# Altium PCB main_PCB.PcbDoc (part 2 of 2)
Units mm, origin at the board's own origin, x right, y up, seen from the top; angles counter-clockwise.
Board outline 160 x 70 mm, 2 copper layers (Top Layer, Bottom Layer); 72 components, 57 nets, 335 pads, 76 vias.
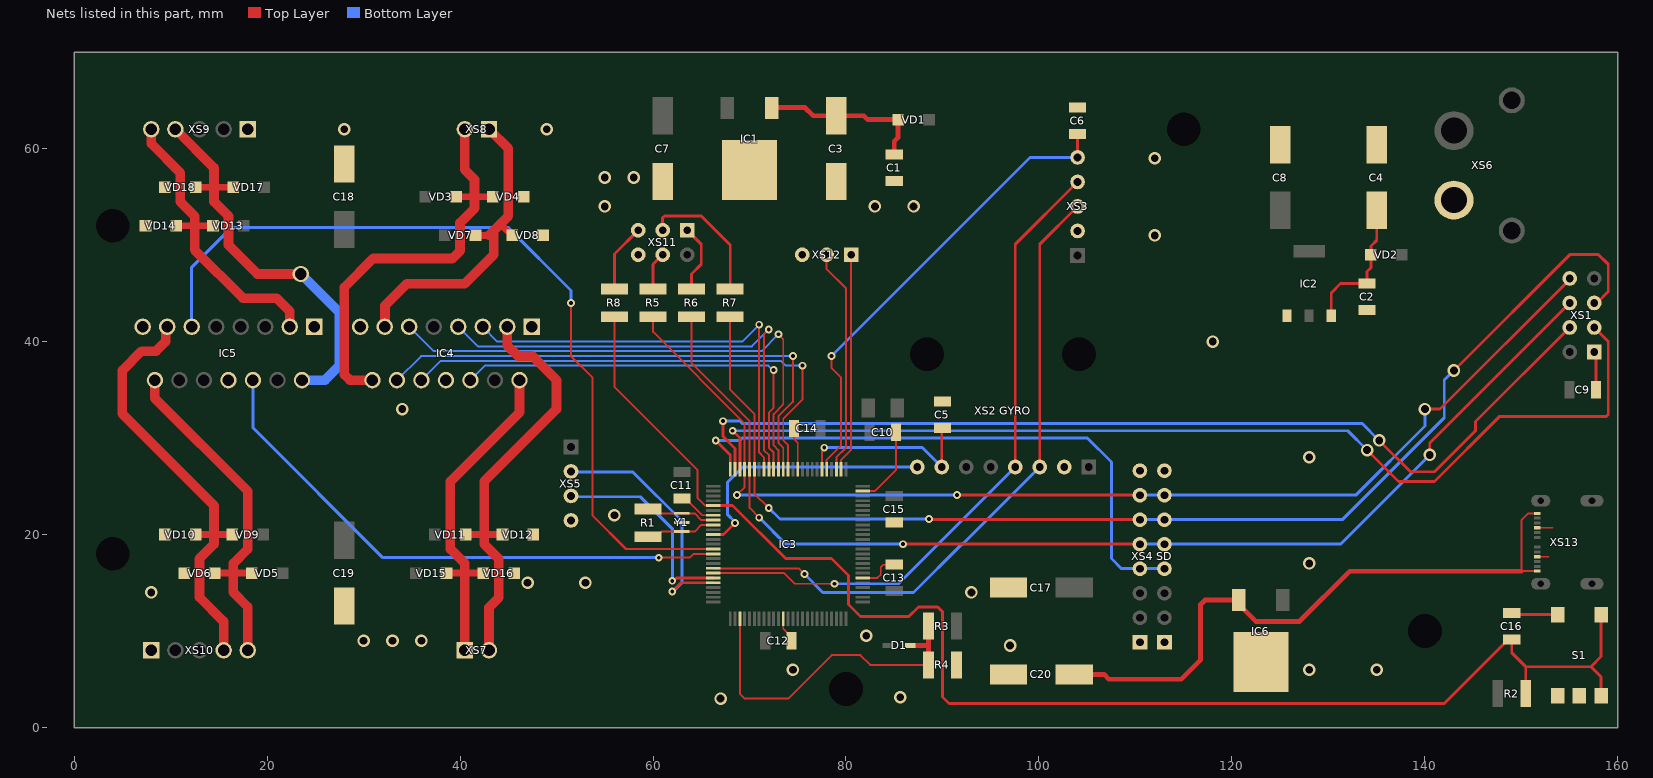
[diagram p2: the nets of this part, all layers, seen from the top]

## Via types
v1: diameter 1.3, hole 0.8, Top Layer to Bottom Layer, tented both sides, 45 vias
v2: diameter 0.8, hole 0.4, Top Layer to Bottom Layer, tented both sides, 30 vias
v3: diameter 1.7, hole 1.2, Top Layer to Bottom Layer, tented both sides, 1 vias

## Nets (pads, with @x,y where several pads share a name; then routed paths per layer and width w, separated by ;. In a path a pad name is that pad's centre, name@x,y a point inside that pad or via, vN(x,y) a via of type N, cw(c..) or ccw(c..) an arc to the next point about the centre after c; other vN are vias at no path point) (continued)
GND: "XS2 GYRO.2" "XS4 SD.1" "XS4 SD.8" C1.2 C2.2 C3.2 C4.2 C5.2 C6.2 C7.2 C8.2 C9.2 C10.2 C11.2 C12.2 C13.2 C14.2 C15.2 C17.2 C18.2 C19.2 C20.2 IC1.2 IC2.1 IC3.11 IC3.32 IC3.62 IC3.81 IC3.99 IC4.1 IC4.8 IC4.15 IC5.1 IC5.8 IC5.15 IC6.2 R4.1 S1.4 S1.5 VD4.2 VD6.2 VD8.2 VD10.2 VD12.2 VD14.2 VD16.2 VD18.2 XS1.1 XS3.2 XS5.4 XS6.2 XS9.1 XS10.1 XS11.6 XS12.3 XS13.4 Y1.2 | length 30.2
  Top Layer w0.2: C11.2@63,23.73 63.37,23.73 65.1,22 IC3.32@66.25,22 ; IC3.62@73.5,11.25 73.5,10.24 C12.2@74.37,9.37 ; C14.2@74.63,31 74.63,29.87 75,29.5 IC3.11@75,26.75 ; IC3.81@81.75,15.5 83.26,15.5 83.602,15.843 83.602,16.602 83.87,16.87 C13.2@85,16.87 ; IC3.99@81.75,24.5 83,24.5 85.17,26.67 C10.2@85.17,30.6 ; XS13.4@151.65,17.7 152.8,17.7 ; XS13.4@151.65,20.7 153.2,20.7
  Top Layer w0.3: C12.2@74.37,9 C12.2@74.37,9.37 ; XS1.1@157.54,38.92 157.74,38.72 C9.2@157.74,35
  other v1: 67,3 85.627,3.127 74.5,6 128,6 135,6 97,8.5 30,9 33,9 36,9 82.1,9.5 8,14 93,14 47,15 53,15 128,17 56,22 128,28 34,33 118,40 112,51 55,54 83,54 87,54 55,57 58,57 112,59 28,62 49,62
"GPS RX": IC3.45 XS5.3 | length 22.1
  Top Layer w0.3: v2(62,15.2) 62.135,15.2 62.435,15.5 IC3.45@66.25,15.5
  Bottom Layer w0.3: XS5.3@51,23.92 58.68,23.92 62,20.6 v2(62,15.2)
"GPS TX": IC3.46 XS5.2 | length 26.4
  Top Layer w0.3: v2(62,14.1) 62.9,15 IC3.46@66.25,15
  Bottom Layer w0.3: XS5.2@51,26.46 57.94,26.46 63,21.4 63,14.965 v2@62.135,14.1
"GYRO ADR": "XS2 GYRO.8" IC3.36 | length 27.6
  Top Layer w0.3: IC3.36@66.25,20 67.3,20 v2(68.5,21.2)
  Bottom Layer w0.3: v2(68.5,21.2) 68.5,21.3 67.7,22.1 67.7,25.4 69.3,27 87.38,27
"GYRO INT": "XS2 GYRO.7" C5.1 IC3.6 | length 19.4
  Top Layer w0.2: IC3.6@77.5,26.75 77.5,28.588 77.75,28.838 v2(77.75,29)
  Top Layer w0.3: 89.92,27 89.92,30.95 C5.1@90,31.03
  Bottom Layer w0.3: v2(77.75,29) 87.92,29 89.92,27
"MAG INT": C6.1 IC3.5 XS3.5 | length 49.3
  Top Layer w0.2: IC3.5@78,26.75 78,27.75 79.5,29.25 79.5,36.25 78.5,37.25 v2(78.5,38.5)
  Top Layer w0.3: XS3.5@104,59.08 C6.1@104,61.53
  Bottom Layer w0.3: v2(78.5,38.5) 99.08,59.08 XS3.5@104,59.08
MISO: "XS4 SD.7" IC3.22 R5.1 XS1.7 | length 119.4
  Top Layer w0.2: R5.1@60,42.55 60,41 69.5,31.5 IC3.22@69.5,26.75 69.5,24.9 v2(68.7,24.1)
  Top Layer w0.3: v2(91.5,24.1) 110.44,24.1 ; v1(140,33) 141.562,33 155,46.438 XS1.7@155,46.54
  Bottom Layer w0.3: v2(68.7,24.1) v2(91.5,24.1) ; 110.46,24.08 113,24.08 132.83,24.08 140,31.25 v1(140,33)
"MLB EN": IC3.18 IC4.5 | length 45.2
  Top Layer w0.2: v2(71,41.75) 71,28.5 71.5,28 IC3.18@71.5,26.75
  Bottom Layer w0.2: IC4.5@42.35,41.53 43.88,40 69.25,40 v2(71,41.75)
"MLF EN": IC3.17 IC4.7 | length 48.7
  Top Layer w0.2: IC3.17@72,26.75 72,28.25 71.5,28.75 71.5,40.75 v2(72,41.25)
  Bottom Layer w0.2: IC4.7@39.81,41.53 41.84,39.5 70.25,39.5 v2(72,41.25)
MOSI: "XS4 SD.5" IC3.21 R6.1 XS1.6 | length 119.9
  Top Layer w0.2: R6.1@64,42.55 64,37.75 70,31.75 70,22.75 v2(71,21.75)
  Top Layer w0.3: v2(85.9,19) 110.46,19 ; v1(140.5,28.25) 140.5,29.5 XS1.6@155,44
  Bottom Layer w0.3: v2(71,21.75) 73.75,19 v2(85.9,19) ; 110.46,19 113,19 131.25,19 v1(140.5,28.25)
"MRB EN": IC3.13 IC4.10 | length 52.3
  Top Layer w0.2: IC3.13@74,26.75 74,29.25 73.5,29.75 73.5,32 75.5,34 v2(75.5,37.5)
  Bottom Layer w0.2: IC4.10@36,36 38,38 73.25,38 73.75,37.5 v2(75.5,37.5)
"MRF EN": IC3.14 IC4.12 | length 54.7
  Top Layer w0.2: IC3.14@73.5,26.75 73.5,29 73,29.5 73,32.25 74.5,33.75 v2(74.5,38.5)
  Bottom Layer w0.2: IC4.12@33.46,36 35.96,38.5 v2(74.5,38.5)
NetC1_1: C1.1 C3.1 IC1.1 VD1.1 | length 17.4
  Top Layer w0.5: IC1.1@72.285,64.217 72.318,64.25 75.75,64.25 76.6,63.4 C3.1@79,63.4 81.85,63.4 81.999,63.251 82.25,63 VD1.1@85.4,63 85.4,61.15 85,60.75 C1.1@85,59.37
NetC2_1: C2.1 C4.1 IC2.3 VD2.1 | length 14.5
  Top Layer w0.3: IC2.3@130.29,42.65 130.29,45.04 131.25,46 C2.1@134,46 134,47.25 134.25,47.5 134.4,47.65 VD2.1@134.4,49 134.4,49.9 135,50.5 C4.1@135,53.6
NetC16_2: C16.2 S1.3 | length 4.8
  Top Layer w0.3: C16.2@149,11.87 149.165,11.705 S1.3@153.753,11.705
NetC20_1: C20.1 IC6.3 XS13.1 | length 65.6
  Top Layer w0.2: XS13.1@151.65,16.2 150,16.2 150,21.5 150.7,22.2 XS13.1@151.65,22.2
  Top Layer w0.3: IC6.3@120.715,12.772 IC6.3@120.715,13.217
  Top Layer w0.5: C20.1@103.65,5.5 106.75,5.5 107.25,5 114.75,5 116.75,7 116.75,12.75 117.217,13.217 IC6.3@120.715,13.217 ; IC6.3@120.715,12.772 122.487,11 127,11 132.2,16.2 150,16.2
NetIC4_2: IC4.2 VD15.2 VD16.1 XS7.1 | length 35.4
  Top Layer w0.7: VD15.2@38.6,16 40.5,16 VD16.1@42.4,16
  Top Layer w1: XS7.1@40.5,8 40.5,16 40.5,17 39,18.5 39,25.5 46.16,32.66 IC4.2@46.16,36
NetIC4_3: IC4.3 VD11.2 VD12.1 XS7.2 | length 44.5
  Top Layer w0.7: VD11.2@40.6,20 42.5,20 VD12.1@44.4,20
  Top Layer w1: XS7.2@43,8 43,12.433 44,13.433 44,17.5 42.5,19 42.5,20 42.5,25.5 50,33 50,36 47.5,38.5 46,38.5 44.89,39.61 IC4.3@44.89,41.53
NetIC4_13: IC4.13 VD7.2 VD8.1 XS8.1 | length 34
  Top Layer w0.7: VD7.2@41.6,51 43,51 ; 44.25,52.15 VD8.1@45.4,51
  Top Layer w1: IC4.13@32.19,41.53 32.227,41.567 32.227,43.727 34.5,46 40.5,46 43.5,49 43.5,51.5 ; 43,51 43.5,51.5 ; XS8.1@43,62 45,60 45,53 44.25,52.25 ; 44.25,52.15 44.25,52.25 ; 43.5,51.5 44.25,52.25
NetIC4_14: IC4.14 VD3.2 VD4.1 XS8.2 | length 43.2
  Top Layer w0.7: VD3.2@39.6,55 41.5,55 VD4.1@43.4,55
  Top Layer w1: IC4.14@30.92,36 28.586,36 28,36.586 28,45.6 31,48.6 39.2,48.6 40,49.4 40,52.3 41.5,53.8 41.5,55 41.5,56.8 40.5,57.8 XS8.2@40.5,62
NetIC5_2: IC5.2 VD17.2 VD18.1 XS9.4 | length 42.6
  Top Layer w0.7: VD18.1@12.6,56 14.5,56 VD17.2@16.5,56
  Top Layer w1: XS9.4@10.5,62 14.5,58 14.5,56 14.5,54.5 16,53 16,50 19,47 v3(23.5,47)
  Bottom Layer w1: v3(23.5,47) 27.5,43 27.5,37.5 26,36 IC5.2@23.62,36
NetIC5_3: IC5.3 VD13.2 VD14.1 XS9.5 | length 32.3
  Top Layer w0.7: VD14.1@10.6,52 12.5,52 VD13.2@14.4,52
  Top Layer w1: XS9.5@8,62 8,60.5 11,57.5 11,54.5 12.5,53 12.5,52 12.5,49.5 17.5,44.5 21,44.5 22.35,43.15 IC5.3@22.35,41.53
NetIC5_13: IC5.13 VD9.2 VD10.1 XS10.4 | length 45.7
  Top Layer w0.7: VD10.1@12.6,20 14.5,20 VD9.2@16.4,20
  Top Layer w1: IC5.13@9.65,41.53 9.5,41.38 9.5,40 8.5,39 7,39 5,37 5,32.5 14.5,23 14.5,20 14.5,19 13,17.5 13,13.5 15.5,11 XS10.4@15.5,8
NetIC5_14: IC5.14 VD5.2 VD6.1 XS10.5 | length 37
  Top Layer w0.7: VD6.1@14.6,16 16.5,16 VD5.2@18.4,16
  Top Layer w1: IC5.14@8.38,36 8.38,34.12 18,24.5 18,18.5 16.5,17 16.5,16 16.5,14 18,12.5 XS10.5@18,8
NetR5_2: R5.2 XS11.4 | length 4
  Top Layer w0.3: R5.2@60,45.45 60,48 XS11.4@61,49
NetR6_2: R6.2 XS11.1 | length 7.1
  Top Layer w0.3: XS11.1@63.54,51.54 65,50.08 65,48 64,47 R6.2@64,45.45
NetR7_2: R7.2 XS11.3 | length 14.1
  Top Layer w0.3: XS11.3@61,51.54 61,52.824 61.176,53 65,53 68,50 R7.2@68,45.45
NetR8_2: R8.2 XS11.5 | length 7.1
  Top Layer w0.3: R8.2@56,45.45 56,49.08 XS11.5@58.46,51.54
"PWM BL": IC3.40 IC5.6 | length 58.4
  Top Layer w0.2: v2(60.6,17.6) 63.8,17.6 64.2,18 IC3.40@66.25,18
  Bottom Layer w0.3: IC5.6@18.54,36 18.54,31.06 32,17.6 v2(60.6,17.6)
"PWM BR": IC3.39 IC5.11 | length 88.1
  Top Layer w0.2: v2(51.5,44) 51.5,38.5 53.75,36.25 53.75,21.95 57.2,18.5 IC3.39@66.25,18.5
  Bottom Layer w0.3: IC5.11@12.19,41.53 12.19,47.69 16.3,51.8 45,51.8 51.5,45.3 v2(51.5,44)
"PWM ML": IC3.16 IC4.6 | length 42.9
  Top Layer w0.2: IC3.16@72.5,26.75 72.5,28.5 72,29 72,32.619 72.5,33.119 v2(72.5,37.05)
  Bottom Layer w0.2: IC4.6@41.08,36 42.58,37.5 71.96,37.5 72.41,37.05 v2(72.5,37.05)
"PWM MR": IC3.15 IC4.11 | length 54.9
  Top Layer w0.2: IC3.15@73,26.75 73,28.75 72.5,29.25 72.5,32.482 73.5,33.482 73.5,40.25 v2(73,40.75)
  Bottom Layer w0.2: IC4.11@34.73,41.53 37.26,39 71.25,39 v2(73,40.75)
RESET: C16.1 IC3.30 R2.2 R8.1 S1.1 S1.2 | length 148.3
  Top Layer w0.2: R8.1@56,42.55 56,35.304 64.59,26.714 64.59,23.836 65.426,23 IC3.30@66.25,23
  Top Layer w0.3: IC3.30@66.25,23 68.25,23 73.75,17.5 78.5,17.5 80.25,15.75 80.25,12.75 81.5,11.5 86.5,11.5 87.5,12.5 89.5,12.5 90,12 90,3.176 90.676,2.5 142,2.5 148.63,9.13 C16.1@149,9.13 149,7.75 150.45,6.3 ; R2.2@150.45,3.5 150.45,6.3 ; S1.2@158.248,3.295 158.248,5.252 157.2,6.3 ; S1.1@158.248,11.705 158.248,7.348 157.2,6.3 ; 150.45,6.3 157.2,6.3
"RF24 CE": IC3.23 XS1.3 | length 109.7
  Top Layer w0.3: v2(68.25,30.75) 69,30 IC3.23@69,26.75 ; v1(134,28.75) 137.25,25.5 141,25.5 147.75,32.25 158.824,32.25 159,32.426 159,40 XS1.3@157.54,41.46
  Bottom Layer w0.3: v2(68.25,30.75) 132,30.75 v1(134,28.75)
"RF24 CSN": IC3.24 XS1.4 | length 102.2
  Top Layer w0.3: v2(67.25,31.75) 67.25,30.178 68.5,28.928 IC3.24@68.5,26.75 ; v1(135.25,29.75) 138.5,26.5 141,26.5 145.25,30.75 145.25,31.71 XS1.4@155,41.46
  Bottom Layer w0.3: v2(67.25,31.75) 69,31.75 69.25,31.5 133.5,31.5 v1(135.25,29.75)
SCK: "XS4 SD.6" IC3.20 R7.1 XS1.5 | length 127.8
  Top Layer w0.2: R7.1@68,42.55 68,35 70.5,32.5 IC3.20@70.5,26.75 70.5,24.25 v2(72,22.75)
  Top Layer w0.3: v2(88.6,21.6) 88.66,21.54 110.46,21.54 ; v1(143,37) 155,49 158,49 159,48 159,45.176 157.824,44 XS1.5@157.54,44
  Bottom Layer w0.3: v2(72,22.75) 73.15,21.6 v2(88.6,21.6) ; 110.46,21.54 113,21.54 131.436,21.54 142,32.104 142,36 v1(143,37)
SCL: "XS2 GYRO.3" IC3.43 XS3.3 | length 68.9
  Top Layer w0.2: IC3.43@66.25,16.5 75.098,16.5 75.698,15.9 v2(75.7,15.9)
  Top Layer w0.3: 100.08,27 100.08,50.08 XS3.3@104,54
  Bottom Layer w0.3: v2(75.7,15.9) 77.6,14 87,14 92,19 92.08,19 100.08,27
"SD CS": "XS4 SD.4" IC3.25 | length 61.7
  Top Layer w0.3: v2(66.5,29.75) 68,28.25 IC3.25@68,26.75
  Bottom Layer w0.3: v2(66.5,29.75) 69,29.75 69.25,30 105,30 107.5,27.5 107.5,17.5 108.54,16.46 110.46,16.46 113,16.46
SDA: "XS2 GYRO.4" IC3.44 XS3.4 | length 69
  Top Layer w0.2: IC3.44@66.25,16 73.6,16 74.7,14.9 v2(78.8,14.9)
  Top Layer w0.3: 97.54,27 97.54,50.08 XS3.4@104,56.54
  Bottom Layer w0.3: v2(78.8,14.9) 85.44,14.9 97.54,27
"Serail RX": IC3.2 XS12.1 | length 22.7
  Top Layer w0.2: IC3.2@79.5,26.75 79.5,27.75 80.54,28.79 XS12.1@80.54,49
"Serial TX": IC3.3 XS12.2 | length 23.5
  Top Layer w0.2: XS12.2@78,49 78,47.5 80,45.5 80,29 79,28 IC3.3@79,26.75
VBAT: D1.1 IC3.53 R3.1 R4.2 | length 35.7
  Top Layer w0.2: IC3.53@69,11.25 69,3.5 69.5,3 74,3 78.5,7.5 81.5,7.5 82.5,6.5 R4.2@88.55,6.5
  Top Layer w0.5: D1.1@86.65,8.5 88.55,8.5 ; R4.2@88.55,6.5 88.55,8.5 ; R3.1@88.55,10.5 88.55,8.5
XTAL1: IC3.34 R1.2 Y1.3 | length 7.3
  Top Layer w0.2: R1.2@59.5,19.75 60.35,19.75 60.9,20.3 Y1.3@63,20.3 64.3,20.3 65,21 IC3.34@66.25,21
XTAL2: IC3.33 R1.1 Y1.1 | length 7.2
  Top Layer w0.2: R1.1@59.5,22.65 60.35,22.65 60.8,22.2 Y1.1@63,22.2 64.3,22.2 65,21.5 IC3.33@66.25,21.5
pads on no net: "XS2 GYRO.5" "XS2 GYRO.6" "XS2 GYRO.nc" "XS4 SD.2" D1.2 IC2.4 IC3.1 IC3.4 IC3.7 IC3.8 IC3.9 IC3.12 IC3.19 IC3.26 IC3.27 IC3.28 IC3.29 IC3.35 IC3.51 IC3.52 IC3.54 IC3.55 IC3.56 IC3.57 IC3.58 IC3.59 IC3.60 IC3.63 IC3.64 IC3.65 IC3.66 IC3.67 IC3.68 IC3.69 IC3.70 IC3.71 IC3.72 IC3.73 IC3.74 IC3.75 IC3.76 IC3.77 IC3.78 IC3.79 IC3.82 IC3.83 IC3.84 IC3.85 IC3.86 IC3.87 IC3.88 IC3.89 IC3.90 IC3.91 IC3.92 IC3.93 IC3.94 IC3.95 IC3.96 IC3.97 XS1.8 XS6.nc XS13.NC

## Polygon pours and split planes (outlines as drawn)
GND on Bottom Layer "GND_L02_P001" (solid, pour order 1): 0,70 0,0 160,0 160,70
GND on Top Layer "GND_L01_P000" (solid, pour order 0): 0,70 0,0 160,0 160,70

## Silkscreen, mask and mechanical layers (free items; w line width, h text height)
Top Overlay:
  lines w0.254: 140,37.75 140,47.25 ; 147.5,38 147.5,47.5
  text "+" at 142.254,66.5 h1.52
  text "G / Fu / Em / M+ / M-" at 6.95,60.584 h1.52 r270
  text "R C O" at 58.004,53.004 h1.3
  text "Prog" at 65.5,48 h1.52
  text "MAG / INT / SDA / SCL / GND / 5V" at 106,48 h1.52
  text "RX / TX / GND" at 74.5,47.5 h1.52 r270
  text "G I 5" at 57.754,46.504 h1.3
  text "MISO NC / MOSI SCK / CSN  CE / 3V3  GND" at 140.5,38 h1.6
  text "ADR / INT / NC / NC / SDA / SCL / GND / 5V" at 86.11,25.73 h1.65 r270
  text "M+ / M- / Em / Fu / G" at 7,12.5 h1.52 r270
  text "GND / MISO / SCK / MOSI / CS / 5V / NC / GND" at 115,8 h1.6
Mechanical 4:
  the board outline again, w0.254
Mechanical 7:
  lines w1: 9,2302 9,2305 329,2305 329,2302 9,2302
  text "BOASFORMAT|А2|1|0|834645670|233858267|1000000000|1:1|" at -35,2515 h0
  text "DimH|-125984252|0|142913386|984645670|-125984252|3937007|2||||js12|False|False|False|False|2" at 404.018,2479.47 h0
  text "DimH|-125984252|0|142913386|984645670|-88976378|3937007|2||||js12|False|False|False|False|2" at 328,2476 h0
  text "DimV|0|-55118111|142913386|984645670|3937008|-28740158|2||||js12|False|False|False|False|2" at 328,2476 h0
  text "DimV|0|-1181102|143307087|917322835|3937008|3937008|1||||js12|False|False|False|False|2" at 329,2305 h0
  text "SET2|Superlayer=MechanicalLayer7|Wsuperlayer=MechanicalLayer8|Layergrid=MechanicalLayer9|Werase=MechanicalLayer11|Layermark=MechanicalLayer12|Layerstamp=MechanicalLayer13|Gridline=0,18|Boardline=0,6|Contourpolygonline=0,6|PcbGridStep=1|PcbGridNumbering=False|PcbGridCleareanceAtView=0|PcbGridNumberEach=l4|PcbGridLineEach=l2|PcbGridCountSecondaryStrip=1|PcbGridEnabledStrip=True|PcbGridHorizontal90=False|PcbGridWhiteAreaBeforeText=True|PcbSignalGridEnabled=True|PcbSignalShowBukva=True|RealSignalLayerNames=False|PcbGridTextsEnabledBothSide=l2|PcbGridEnabledBothSide=l2|PcbPolarGridEnabled=False|PcbPolarGridAngleStep=10|PcbPolarGridRadialStep=10|PcbPolarGridCenterPcbGrid=False|SilkShowPad=True|SilkViewName=Слой маркировки|SilkShowHole=True|SilkShowAxis=True|SilkShowBukva=True|SilkShowGrid=False|SolderShowGrid=False|SolderViewName=Слой маски|SolderShowAxis=False|SolderShowBukva=False|MainViewShowGrid=False|MainViewMinDiameterHoles=2|MainViewUseShapesDrill=False|ShowBukvaOnSboky=True|ShowBukvaViews=True|Density=2,2|CustomHoleSizeFactor=1|PcbDoubleLineHeader=False|PcbAccuracy=a4|TableName=Таблица 1|RazrezWidth=100|RealLayerNames=False|RazrezShowBukva=False|RazrezBukva=В-В|Sher=Rz 160|Asstoplayer=MechanicalLayer1|Asstoplayer2=None|Assbottomlayer=MechanicalLayer2|Assbottomlayer2=None|AssMinDiameterHoles=2|AssDim=False|AssMech=False|AssSilk=False|AssComponentSilk=False|AssFreeSilk=False|AssSmdPads=False|AssGridEnable=False|AssShowBukva=True|Mirror=Horisontal|PcbGridFontSize=5|PcbGridCenterZero=False|TTStampDistance=12|MainFontSize=5|PolyShtrihEnable=True|RegionShtrihEnable=False|PolyStep=2|PcbDrillDrawingGridEnabled=False|PcbDrillDrawingViewName=Слой сверловки|PcbDrillDrawingShowBukva=False|PcbDrillDrawingShowAxis=False|PcbSignalLayersUseDrill=True|PcbSignalLayersUseWhiteHoles=True|PcbSignalLayersUseShapesDrill=False|PcbSignalLayersShowAxis=False|Thinline=0,18|Basicline=0,6" at -35,-24.975 h0
  text "2TT0013#12 Остальные технические требования по ОСТ4 Г0.070.014 - 75." at -35,-25 h0
  text "2TT0012#11 Тип маркуровки: лазерная (дпускается замена на аналогичную по эксплуатационной стойкости)" at -35,-25 h0
  text "2TT0011#10. Тип паяльной маски, жидкая (допускается замена на аналогичную по эксплуатационией стоскости) Цвет паяльной маски зеленый Контактные площадки от краски предохранить" at -35,-25 h0
  text "2TT0010#9 Финишисе покрытие металлизурованных поверхностей меди по ГОСТ 9.307 86, контактных зон припоем ПОС - 67 ГОСТ 21930 - 75 полщиной не менее 20 мкм." at -35,-25 h0
  text "2TT0009#8 Плата болжна соответствовать ГОСТ 23752 - 79 группа жесткости - 2" at -35,-25 h0
  text "2TT0008#7 Лараметры отверстий платы приведены в таблице 1" at -35,-25 h0
  text "2TT0007#- минимальное номинальное расстояние между элементами проводящего рисунка - 0.2мм;" at -35,-25 h0
  text "2TT0006#- минимальная номинальная ширина проводника - 0 2 мм," at -35,-25 h0
  text "2TT0005#6. Класс точности платы по ГОСТ Р 53429 - 2009 -4:" at -35,-25 h0
  text "2TT0004#5; Прату изготовить химическим негативным методом." at -35,-25 h0
  text "2TT0003#4 Шаг координатной сетки 4 мм." at -35,-25 h0
  text "2TT0002#3 Общие допуски формы и расположения ГОСТ 30893.2 - 2002 - Н." at -35,-25 h0
  text "2TT0001#2 Общие допуски по ГОСТ 30893.1 - 2002: H12, h12, ±IT712P/2." at -35,-25 h0
  text "2TT0000#1 \"Размеры для справок." at -35,-25 h0
  text "TT0013#12 Остальные технические требования по ОСТ4 Г0.070.014 - 75." at -35,-25 h0
  text "TT0012#11 Тип маркуровки: лазерная (дпускается замена на аналогичную по эксплуатационной стойкости)" at -35,-25 h0
  text "TT0011#10. Тип паяльной маски, жидкая (допускается замена на аналогичную по эксплуатационией стоскости) Цвет паяльной маски зеленый Контактные площадки от краски предохранить" at -35,-25 h0
  text "TT0010#9 Финишисе покрытие металлизурованных поверхностей меди по ГОСТ 9.307 86, контактных зон припоем ПОС - 67 ГОСТ 21930 - 75 полщиной не менее 20 мкм." at -35,-25 h0
  text "TT0009#8 Плата болжна соответствовать ГОСТ 23752 - 79 группа жесткости - 2" at -35,-25 h0
  text "TT0008#7 Лараметры отверстий платы приведены в таблице 1" at -35,-25 h0
  text "TT0007#- минимальное номинальное расстояние между элементами проводящего рисунка - 0.2мм;" at -35,-25 h0
  text "TT0006#- минимальная номинальная ширина проводника - 0 2 мм," at -35,-25 h0
  text "TT0005#6. Класс точности платы по ГОСТ Р 53429 - 2009 -4:" at -35,-25 h0
  text "TT0004#5; Прату изготовить химическим негативным методом." at -35,-25 h0
  text "TT0003#4 Шаг координатной сетки 4 мм." at -35,-25 h0
  text "TT0002#3 Общие допуски формы и расположения ГОСТ 30893.2 - 2002 - Н." at -35,-25 h0
  text "TT0001#2 Общие допуски по ГОСТ 30893.1 - 2002: H12, h12, ±IT712P/2." at -35,-25 h0
  text "TT0000#1 \"Размеры для справок." at -35,-25 h0
  text "STAMP|Наименование2|плата управления" at -35,-25 h0
  text "STAMP|Наименование1|Автоматизированый подводный дрон" at -35,-25 h0
  text "STAMP|Проверил|Журавлёва Л.В." at -35,-25 h0
  text "STAMP|Разработал|Гущин Г.А." at -35,-25 h0
  text "STAMP|Компания2|МГТУ им. Н.Э. Баумана" at -35,-25 h0
  text "STAMP|Компания1|Группа ИУ4-81Б" at -35,-25 h0
  text "STAMP|Масса|" at -35,-25 h0
  text "2STAMP|Проверил|Журавлёва Л.В." at -35,-25 h0
  text "2STAMP|Разработал|Гущин Г.А." at -35,-25 h0
  text "2STAMP|Компания2|МГТУ им. Н.Э. Буамана" at -35,-25 h0
  text "2STAMP|Компания1|Группа ИУ4-81Б" at -35,-25 h0
  text "2STAMP|Масса|" at -35,-25 h0
  text "BOASVIADRILLTABLE:triangle,157480,30,|smallrhomb,314961,45,|smallquare,472441,1," at -35,-25 h0
  text "2BOASDRILLTABLE:circle0001,275591,Да,4,True,|circle0010,314961,Да,50,True,|circle0011,472441,Да,44,True,|circle0100,708661,Да,2,True,|circle0101,1062992,Да,2,True,|circle1001,1377953,Нет,7,True," at -35,-25 h0
Mechanical 8:
  region: 339.092,2305.092 339.739,2306.785 340.23,2310.499 339.096,2310.5 339.095,2309.568 339.658,2310 339.003,2305.093
  region: 338.908,2305.092 338.261,2306.785 337.77,2310.499 338.904,2310.5 338.905,2309.568 338.342,2310 338.997,2305.093
  region: 338.908,2301.908 338.261,2300.215 337.77,2296.501 338.904,2296.5 338.905,2297.432 338.342,2297 338.997,2301.907
  region: 339.092,2301.908 339.739,2300.215 340.23,2296.501 339.096,2296.5 339.095,2297.432 339.658,2297 339.003,2301.907
  region: 8.092,2485.908 9.785,2485.261 13.499,2484.77 13.5,2485.904 12.568,2485.905 13,2485.342 8.093,2485.997
  region: 8.092,2486.092 9.785,2486.739 13.499,2487.23 13.5,2486.096 12.568,2486.095 13,2486.658 8.093,2486.003
  region: 327.908,2486.092 326.215,2486.739 322.501,2487.23 322.5,2486.096 323.432,2486.095 323,2486.658 327.907,2486.003
  region: 327.908,2485.908 326.215,2485.261 322.501,2484.77 322.5,2485.904 323.432,2485.905 323,2485.342 327.907,2485.997
  region: 338.092,2336.092 338.739,2337.785 339.23,2341.499 338.096,2341.5 338.095,2340.568 338.658,2341 338.003,2336.093
  region: 337.908,2336.092 337.261,2337.785 336.77,2341.499 337.904,2341.5 337.905,2340.568 337.342,2341 337.997,2336.093
  region: 337.908,2475.908 337.261,2474.215 336.77,2470.501 337.904,2470.5 337.905,2471.432 337.342,2471 337.997,2475.907
  region: 338.092,2475.908 338.739,2474.215 339.23,2470.501 338.096,2470.5 338.095,2471.432 338.658,2471 338.003,2475.907
Mechanical 9:
  region: 339,2305 338.342,2310 339,2309.5 339.658,2310
  region: 339,2302 339.658,2297 339,2297.5 338.342,2297
  region: 8,2486 13,2486.658 12.5,2486 13,2485.342
  region: 328,2486 323,2485.342 323.5,2486 323,2486.658
  region: 338,2336 337.342,2341 338,2340.5 338.658,2341
  region: 338,2476 338.658,2471 338,2471.5 337.342,2471
  lines w0.18: 8,2476 8,2487 ; 8,2486 328,2486 ; 328,2336 339,2336 ; 328,2487 328,2476 339,2476 ; 329,2302 340,2302 ; 329,2305 340,2305 ; 338,2336 338,2476 ; 339,2294 339,2317.908
  text "160" at 164.431,2488.53 h7.68
  text "70" at 335.47,2403.369 h7.68 r90
  text "1.5" at 336.47,2310.88 h7.68 r90
Mechanical 13:
  lines w0.18: 369,2105 434,2105 ; 369,2110 434,2110 ; 369,2115 434,2115 ; 369,2120 434,2120 ; 369,2125 434,2125 ; 369,2140 434,2140 ; 369,2145 434,2145 ; 369,2150 434,2150 ; 508.96,2120 508.96,2135 ; 513.98,2120 513.98,2135 ; 530.7,2497.1 533.8,2491.7 539.4,2501.5 ; -35,2095 559,2095 559,2515 -35,2515 -35,2095
  lines w0.6: -27,2125 -15,2125 ; -27,2160 -15,2160 ; -27,2185 -15,2185 ; -27,2210 -15,2210 ; -27,2327 -15,2327 ; -22,2100 -22,2245 ; -22,2267 -22,2387 ; -15,2245 -27,2245 -27,2100 -15,2100 ; -15,2267 -27,2267 -27,2387 -15,2387 ; -15,2496 55,2496 55,2510 ; 369,2100 369,2155 554,2155 ; 369,2130 434,2130 ; 369,2135 434,2135 ; 376,2130 376,2155 ; 386,2100 386,2155 ; 409,2100 409,2155 ; 424,2100 424,2155 ; 434,2100 434,2155 554,2155 ; 434,2115 504,2115 554,2115 ; 434,2140 554,2140 ; 491,2499 496,2490 503.6,2504 ; 503.7,2504 546,2504 ; 504,2100 504,2140 ; 504,2120 554,2120 ; 504,2135 519,2135 554,2135 ; 519,2120 519,2140 ; 524.57,2115 524.57,2120 ; 536,2120 536,2140 ; 554,2163 554,2155 ; -15,2100 554,2100 554,2510 -15,2510 -15,2100
  text "Rz 160" at 503.7,2491.7 h10.75
  text "(" at 527,2491.7 h10.75
  text ")" at 538,2491.7 h10.75
  text "Перв. примен." at -22.962,2346.979 h5.38 r90
  text "Справ. №" at -22.962,2289.504 h5.38 r90
  text "Подп. и дата" at -22.962,2217.571 h5.38 r90
  text "Инв. № дубл." at -22.962,2188.086 h5.38 r90
  text "1 \"Размеры для справок. / 2 Общие допуски по ГОСТ 30893.1 - 2002: H12, h12, ±IT712P/2. / 3 Общие допуски формы и расположения ГОСТ 30893.2 - 2002 - Н. / 4 Шаг координатной сетки 4 мм. / 5; Прату изготовить химическим негативным методом. / 6. Класс точности платы по ГОСТ Р 53429 - 2009 -4: / - минимальная номинальная ширина проводника - 0 2 мм, / - минимальное номинальное расстояние между элементами проводящего рисунка - 0.2мм; / 7 Лараметры отверстий платы приведены в таблице 1 / 8 Плата болжна соответствовать ГОСТ 23752 - 79 группа жесткости - 2 / 9 Финишисе покрытие металлизурованных поверхностей меди по ГОСТ 9.307 86, контактных зон припоем ПОС - 67 ГОСТ 21930 - 75 полщиной не менее 20 мкм. / 10. Тип паяльной маски, жидкая (допускается замена на аналогичную по эксплуатационией стоскости) Цвет паяльной маски зеленый Контактные площадки от краски предохранить / 11 Тип маркуровки: лазерная (дпускается замена на аналогичную по эксплуатационной стойкости) / 12 Остальные технические требования по ОСТ4 Г0.070.014 - 75." at 374,2175 h7.68
  text "Взам. инв. №" at -22.962,2163.108 h5.38 r90
  text "Лит." at 508.194,2135.962 h5.38
  text "Масса" at 522.916,2135.962 h5.38
  text "Масштаб" at 537.836,2135.962 h5.38
  text "Автоматизированый подводный дрон" at 434.499,2133.157 h6.44
  text "Подп. и дата" at -22.962,2133.071 h5.38 r90
  text "Изм." at 369.569,2130.962 h5.38
  text "Лист" at 376.858,2130.962 h5.38
  text "№ докум." at 391,2130.962 h5.38
  text "Подп." at 412.773,2130.962 h5.38
  text "Дата" at 424.793,2130.962 h5.38
  text "Разраб." at 369.533,2125.771 h5.38
  text "Гущин Г.А." at 386.68,2125.771 h5.38
  text "1:1" at 542.729,2125.303 h7.68
  text "плата управления" at 448.702,2124.803 h7.68
  text "Пров." at 369.533,2120.771 h5.38
  text "Журавлёва Л.В." at 386.68,2120.771 h5.2
  text "Т.контр." at 369.533,2115.771 h5.38
  text "Лист" at 505.442,2115.771 h5.38
  text "Листов" at 526.485,2115.771 h5.38
  text "1" at 546.4,2115.771 h5.38
  text "Группа ИУ4-81Б" at 511.052,2108.303 h7.68
  text "Н.контр." at 369.533,2105.771 h5.38
  text "Инв. № подл." at -22.962,2103.086 h5.38 r90
  text "МГТУ им. Н.Э. Баумана" at 504.558,2102.303 h7.68
  text "Утв." at 369.533,2100.771 h5.38
  text "Копировал" at 444.533,2095.771 h5.38
  text "Формат А2" at 525.121,2095.771 h5.38

## Text inside footprints (layer, text, board x,y; h text height)
ZBOAS169292952: Mechanical 7 "160" at 323.934,2327.122 h8.75; Mechanical 7 "156" at 316.339,2327.122 h8.75; Mechanical 7 "152" at 308.124,2327.122 h8.75; Mechanical 7 "148" at 300.023,2327.122 h8.75; Mechanical 7 "144" at 292.408,2327.122 h8.75; Mechanical 7 "140" at 283.934,2327.122 h8.75; Mechanical 7 "136" at 276.339,2327.122 h8.75; Mechanical 7 "132" at 268.124,2327.122 h8.75; Mechanical 7 "128" at 260.023,2327.122 h8.75; Mechanical 7 "124" at 252.408,2327.122 h8.75; Mechanical 7 "120" at 243.934,2327.122 h8.75; Mechanical 7 "116" at 236.695,2327.122 h8.75; Mechanical 7 "112" at 228.481,2327.122 h8.75; Mechanical 7 "108" at 220.023,2327.122 h8.75; Mechanical 7 "104" at 212.408,2327.122 h8.75; Mechanical 7 "100" at 203.934,2327.122 h8.75; Mechanical 7 "96" at 197.052,2327.122 h8.75; Mechanical 7 "92" at 188.837,2327.122 h8.75; Mechanical 7 "88" at 180.687,2327.122 h8.75; Mechanical 7 "84" at 173.072,2327.122 h8.75; Mechanical 7 "80" at 164.598,2327.122 h8.75; Mechanical 7 "76" at 157.23,2327.122 h8.75; Mechanical 7 "72" at 149.015,2327.122 h8.75; Mechanical 7 "68" at 140.687,2327.122 h8.75; Mechanical 7 "64" at 133.072,2327.122 h8.75; Mechanical 7 "60" at 124.598,2327.122 h8.75; Mechanical 7 "56" at 116.873,2327.122 h8.75; Mechanical 7 "52" at 108.659,2327.122 h8.75; Mechanical 7 "48" at 100.74,2327.122 h8.75; Mechanical 7 "44" at 93.124,2327.122 h8.75; Mechanical 7 "40" at 84.651,2327.122 h8.75; Mechanical 7 "36" at 76.873,2327.122 h8.75; Mechanical 7 "32" at 68.659,2327.122 h8.75; Mechanical 7 "28" at 60.557,2327.122 h8.75; Mechanical 7 "24" at 52.942,2327.122 h8.75; Mechanical 7 "20" at 44.468,2327.122 h8.75; Mechanical 7 "16" at 37.768,2327.122 h8.75; Mechanical 7 "12" at 29.554,2327.122 h8.75; Mechanical 7 "8" at 22.295,2327.122 h8.75; Mechanical 7 "4" at 14.732,2327.122 h8.75; Mechanical 7 "0" at 6.206,2327.122 h8.75; Mechanical 7 "68" at -2.626,2469.497 h8.75; Mechanical 7 "64" at -1.856,2461.497 h8.75; Mechanical 7 "60" at -2.804,2453.497 h8.75; Mechanical 7 "56" at -2.253,2445.497 h8.75; Mechanical 7 "52" at -2.683,2437.497 h8.75; Mechanical 7 "48" at -2.521,2429.497 h8.75; Mechanical 7 "44" at -1.751,2421.497 h8.75; Mechanical 7 "40" at -2.699,2413.497 h8.75; Mechanical 7 "36" at -2.253,2405.497 h8.75; Mechanical 7 "32" at -2.683,2397.497 h8.75; Mechanical 7 "28" at -2.885,2389.497 h8.75; Mechanical 7 "24" at -2.116,2381.497 h8.75; Mechanical 7 "20" at -3.063,2373.497 h8.75; Mechanical 7 "16" at -0.463,2365.497 h8.75; Mechanical 7 "12" at -0.892,2357.497 h8.75; Mechanical 7 "8" at 0.59,2349.497 h8.75; Mechanical 7 "4" at 1.465,2341.497 h8.75; Mechanical 7 "0" at 0.412,2333.497 h8.75
ZBOAS173290748: Mechanical 7 "160" at 324.934,2283.872 h8.75; Mechanical 7 "156" at 317.339,2283.872 h8.75; Mechanical 7 "152" at 309.124,2283.872 h8.75; Mechanical 7 "148" at 301.023,2283.872 h8.75; Mechanical 7 "144" at 293.408,2283.872 h8.75; Mechanical 7 "140" at 284.934,2283.872 h8.75; Mechanical 7 "136" at 277.339,2283.872 h8.75; Mechanical 7 "132" at 269.124,2283.872 h8.75; Mechanical 7 "128" at 261.023,2283.872 h8.75; Mechanical 7 "124" at 253.408,2283.872 h8.75; Mechanical 7 "120" at 244.934,2283.872 h8.75; Mechanical 7 "116" at 237.695,2283.872 h8.75; Mechanical 7 "112" at 229.481,2283.872 h8.75; Mechanical 7 "108" at 221.023,2283.872 h8.75; Mechanical 7 "104" at 213.408,2283.872 h8.75; Mechanical 7 "100" at 204.934,2283.872 h8.75; Mechanical 7 "96" at 198.052,2283.872 h8.75; Mechanical 7 "92" at 189.837,2283.872 h8.75; Mechanical 7 "88" at 181.687,2283.872 h8.75; Mechanical 7 "84" at 174.072,2283.872 h8.75; Mechanical 7 "80" at 165.598,2283.872 h8.75; Mechanical 7 "76" at 158.23,2283.872 h8.75; Mechanical 7 "72" at 150.015,2283.872 h8.75; Mechanical 7 "68" at 141.687,2283.872 h8.75; Mechanical 7 "64" at 134.072,2283.872 h8.75; Mechanical 7 "60" at 125.598,2283.872 h8.75; Mechanical 7 "56" at 117.873,2283.872 h8.75; Mechanical 7 "52" at 109.659,2283.872 h8.75; Mechanical 7 "48" at 101.74,2283.872 h8.75; Mechanical 7 "44" at 94.124,2283.872 h8.75; Mechanical 7 "40" at 85.651,2283.872 h8.75; Mechanical 7 "36" at 77.873,2283.872 h8.75; Mechanical 7 "32" at 69.659,2283.872 h8.75; Mechanical 7 "28" at 61.557,2283.872 h8.75; Mechanical 7 "24" at 53.942,2283.872 h8.75; Mechanical 7 "20" at 45.468,2283.872 h8.75; Mechanical 7 "16" at 38.768,2283.872 h8.75; Mechanical 7 "12" at 30.554,2283.872 h8.75; Mechanical 7 "8" at 23.295,2283.872 h8.75; Mechanical 7 "4" at 15.732,2283.872 h8.75; Mechanical 7 "0" at 7.206,2283.872 h8.75; Mechanical 7 "68" at -1.626,2141.497 h8.75; Mechanical 7 "64" at -0.856,2149.497 h8.75; Mechanical 7 "60" at -1.804,2157.497 h8.75; Mechanical 7 "56" at -1.253,2165.497 h8.75; Mechanical 7 "52" at -1.683,2173.497 h8.75; Mechanical 7 "48" at -1.521,2181.497 h8.75; Mechanical 7 "44" at -0.751,2189.497 h8.75; Mechanical 7 "40" at -1.699,2197.497 h8.75; Mechanical 7 "36" at -1.253,2205.497 h8.75; Mechanical 7 "32" at -1.683,2213.497 h8.75; Mechanical 7 "28" at -1.885,2221.497 h8.75; Mechanical 7 "24" at -1.116,2229.497 h8.75; Mechanical 7 "20" at -2.063,2237.497 h8.75; Mechanical 7 "16" at 0.537,2245.497 h8.75; Mechanical 7 "12" at 0.108,2253.497 h8.75; Mechanical 7 "8" at 1.59,2261.497 h8.75; Mechanical 7 "4" at 2.465,2269.497 h8.75; Mechanical 7 "0" at 1.412,2277.497 h8.75
ZBOAS1574898070: Mechanical 12 "-" at 467.677,2380.803 h7.68; Mechanical 12 "Нет" at 507.579,2380.803 h7.68; Mechanical 12 "3,5" at 419.127,2380.803 h7.68; Mechanical 12 "7" at 538.242,2380.803 h7.68; Mechanical 12 "4,1" at 465.736,2388.803 h7.68; Mechanical 12 "Да" at 509.05,2388.803 h7.68; Mechanical 12 "2,7" at 418.81,2388.803 h7.68; Mechanical 12 "2" at 537.901,2388.803 h7.68; Mechanical 12 "2,7" at 465.1,2396.803 h7.68; Mechanical 12 "Да" at 509.05,2396.803 h7.68; Mechanical 12 "1,8" at 419.948,2396.803 h7.68; Mechanical 12 "2" at 537.901,2396.803 h7.68; Mechanical 12 "1,7" at 466.042,2404.803 h7.68; Mechanical 12 "Да" at 509.05,2404.803 h7.68; Mechanical 12 "1,2" at 419.88,2404.803 h7.68; Mechanical 12 "44" at 537.055,2404.803 h7.68; Mechanical 12 "1,5" at 466.202,2412.803 h7.68; Mechanical 12 "Да" at 509.05,2412.803 h7.68; Mechanical 12 "0,8" at 419.119,2412.803 h7.68; Mechanical 12 "50" at 536.636,2412.803 h7.68; Mechanical 12 "1,2" at 466.17,2420.803 h7.68; Mechanical 12 "Да" at 509.05,2420.803 h7.68; Mechanical 12 "0,7" at 418.924,2420.803 h7.68; Mechanical 12 "4" at 538.466,2420.803 h7.68; Mechanical 12 "1,7" at 466.042,2428.803 h7.68; Mechanical 12 "Да" at 509.05,2428.803 h7.68; Mechanical 12 "1,2" at 419.88,2428.803 h7.68; Mechanical 12 "1" at 538.722,2428.803 h7.68; Mechanical 12 "1,3" at 466.394,2436.803 h7.68; Mechanical 12 "Да" at 509.05,2436.803 h7.68; Mechanical 12 "0,8" at 419.119,2436.803 h7.68; Mechanical 12 "45" at 536.682,2436.803 h7.68; Mechanical 12 "0,8" at 465.409,2444.803 h7.68; Mechanical 12 "Да" at 509.05,2444.803 h7.68; Mechanical 12 "0,4" at 419.457,2444.803 h7.68; Mechanical 12 "30" at 536.636,2444.803 h7.68; Mechanical 12 "отв." at 535.242,2452.553 h7.68; Mechanical 12 "Кол." at 535.463,2460.053 h7.68; Mechanical 12 "металлизации" at 496.115,2452.553 h7.68; Mechanical 12 "Наличие" at 503.032,2460.053 h7.68; Mechanical 12 "площадки, мм" at 453.81,2452.553 h7.68; Mechanical 12 "Диаметр контактной" at 444.5,2460.053 h7.68; Mechanical 12 "мм" at 420.986,2452.553 h7.68; Mechanical 12 "Диаметр отв.," at 408.533,2460.053 h7.68; Mechanical 12 "обозначение отв." at 366.114,2452.553 h7.68; Mechanical 12 "Условное" at 374.73,2460.053 h7.68; Mechanical 12 "Таблица 1" at 365,2467.5 h7.68